# Altium PCB ToneControl.PcbDoc
Units mil, origin at the board's own origin, x right, y up, seen from the top; angles counter-clockwise.
Board outline 3700 x 3700 mil, 2 copper layers (Top Layer, Bottom Layer); 38 components, 33 nets, 92 pads, 0 vias.
Unrouted connection lines stored in the file: 1.
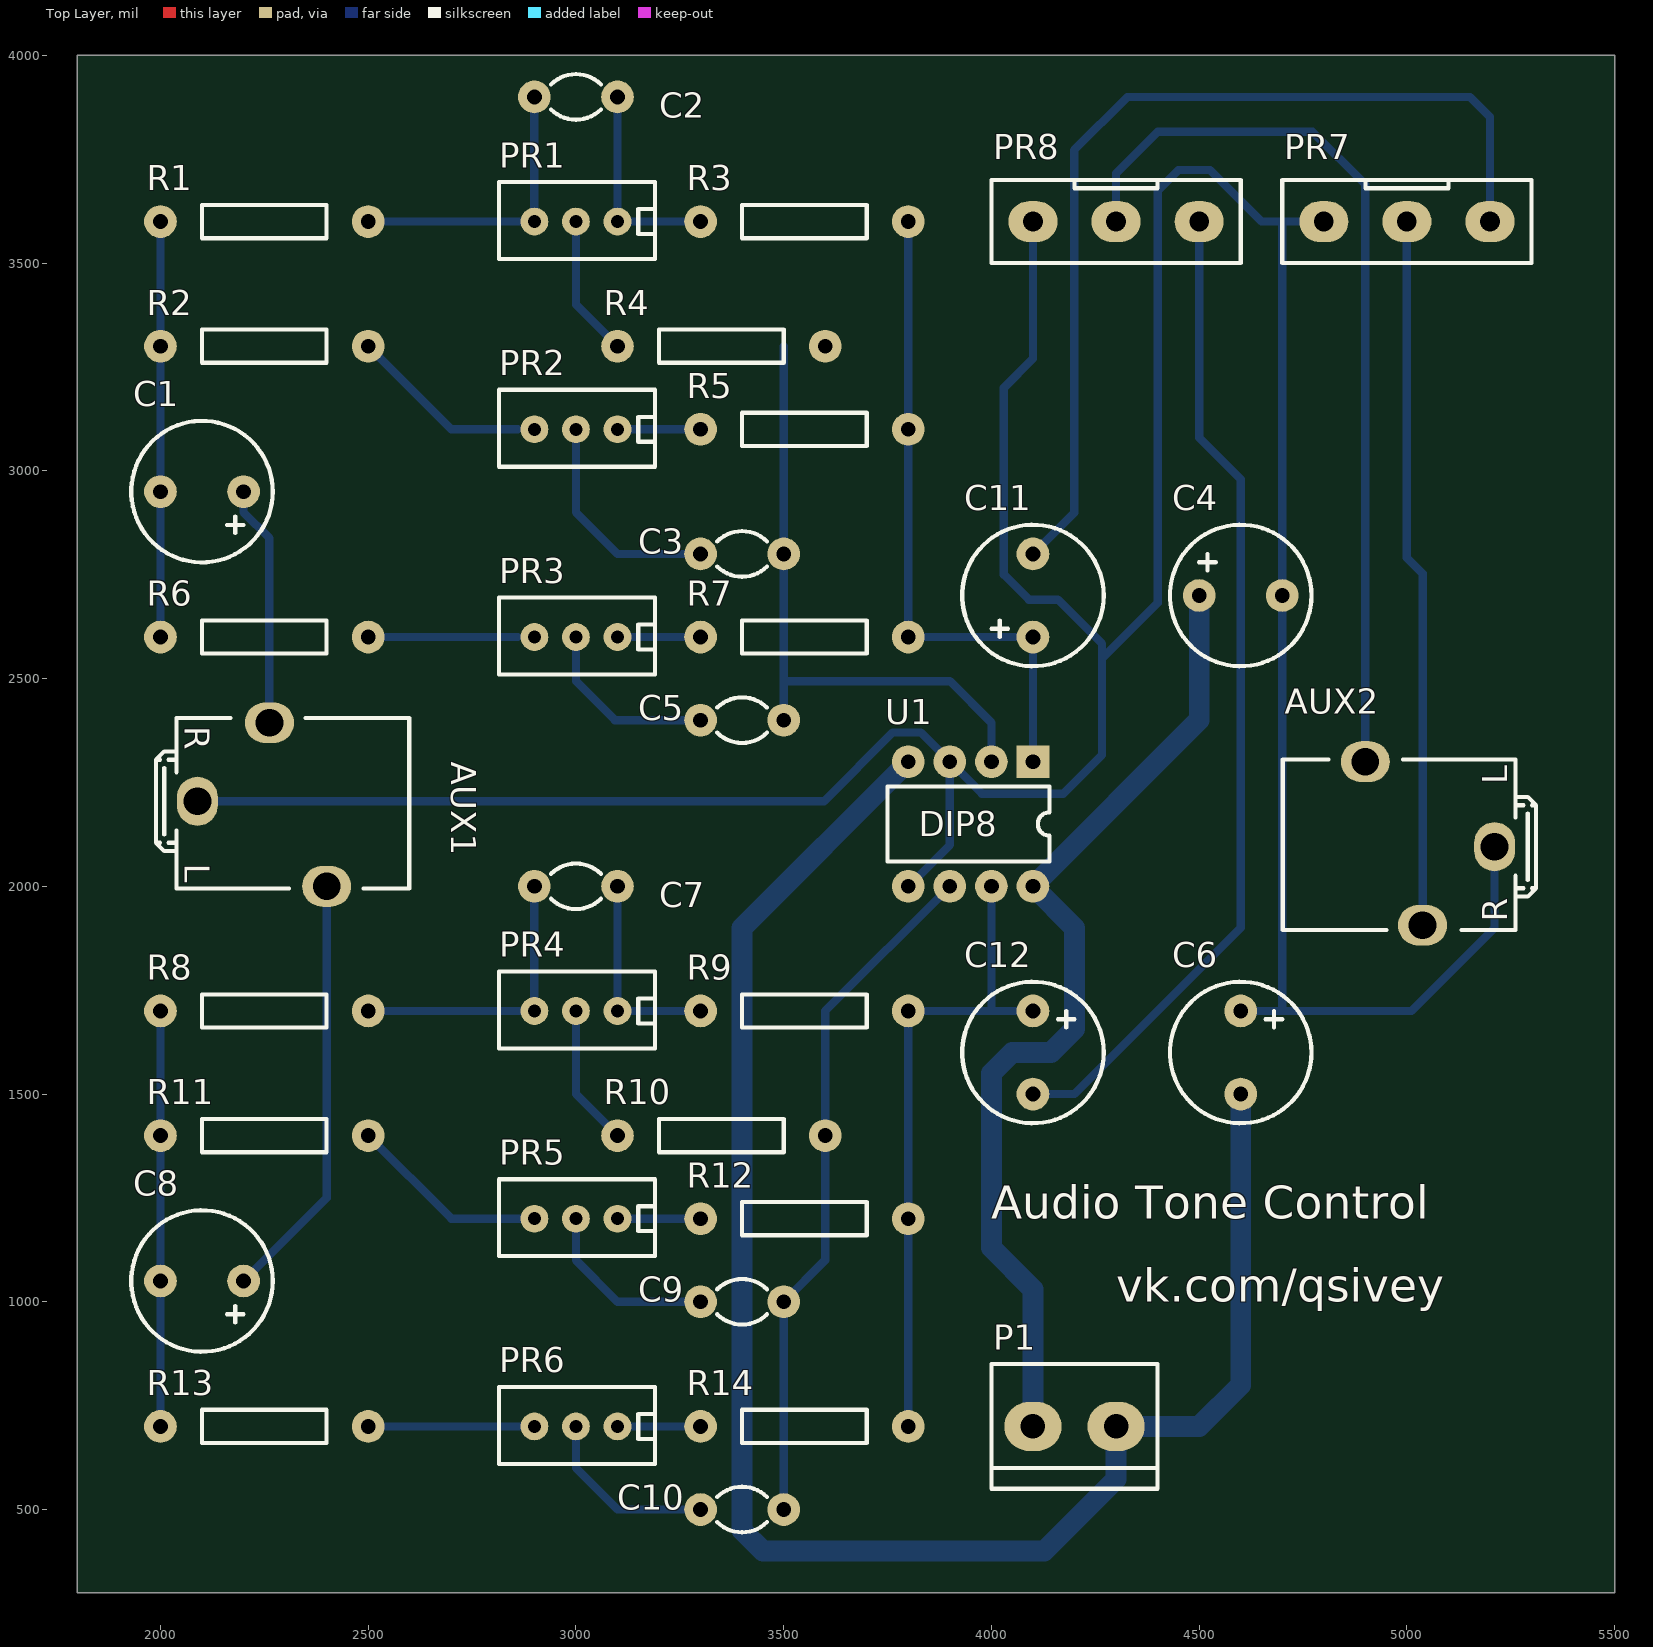
[diagram p0: Top Layer view]
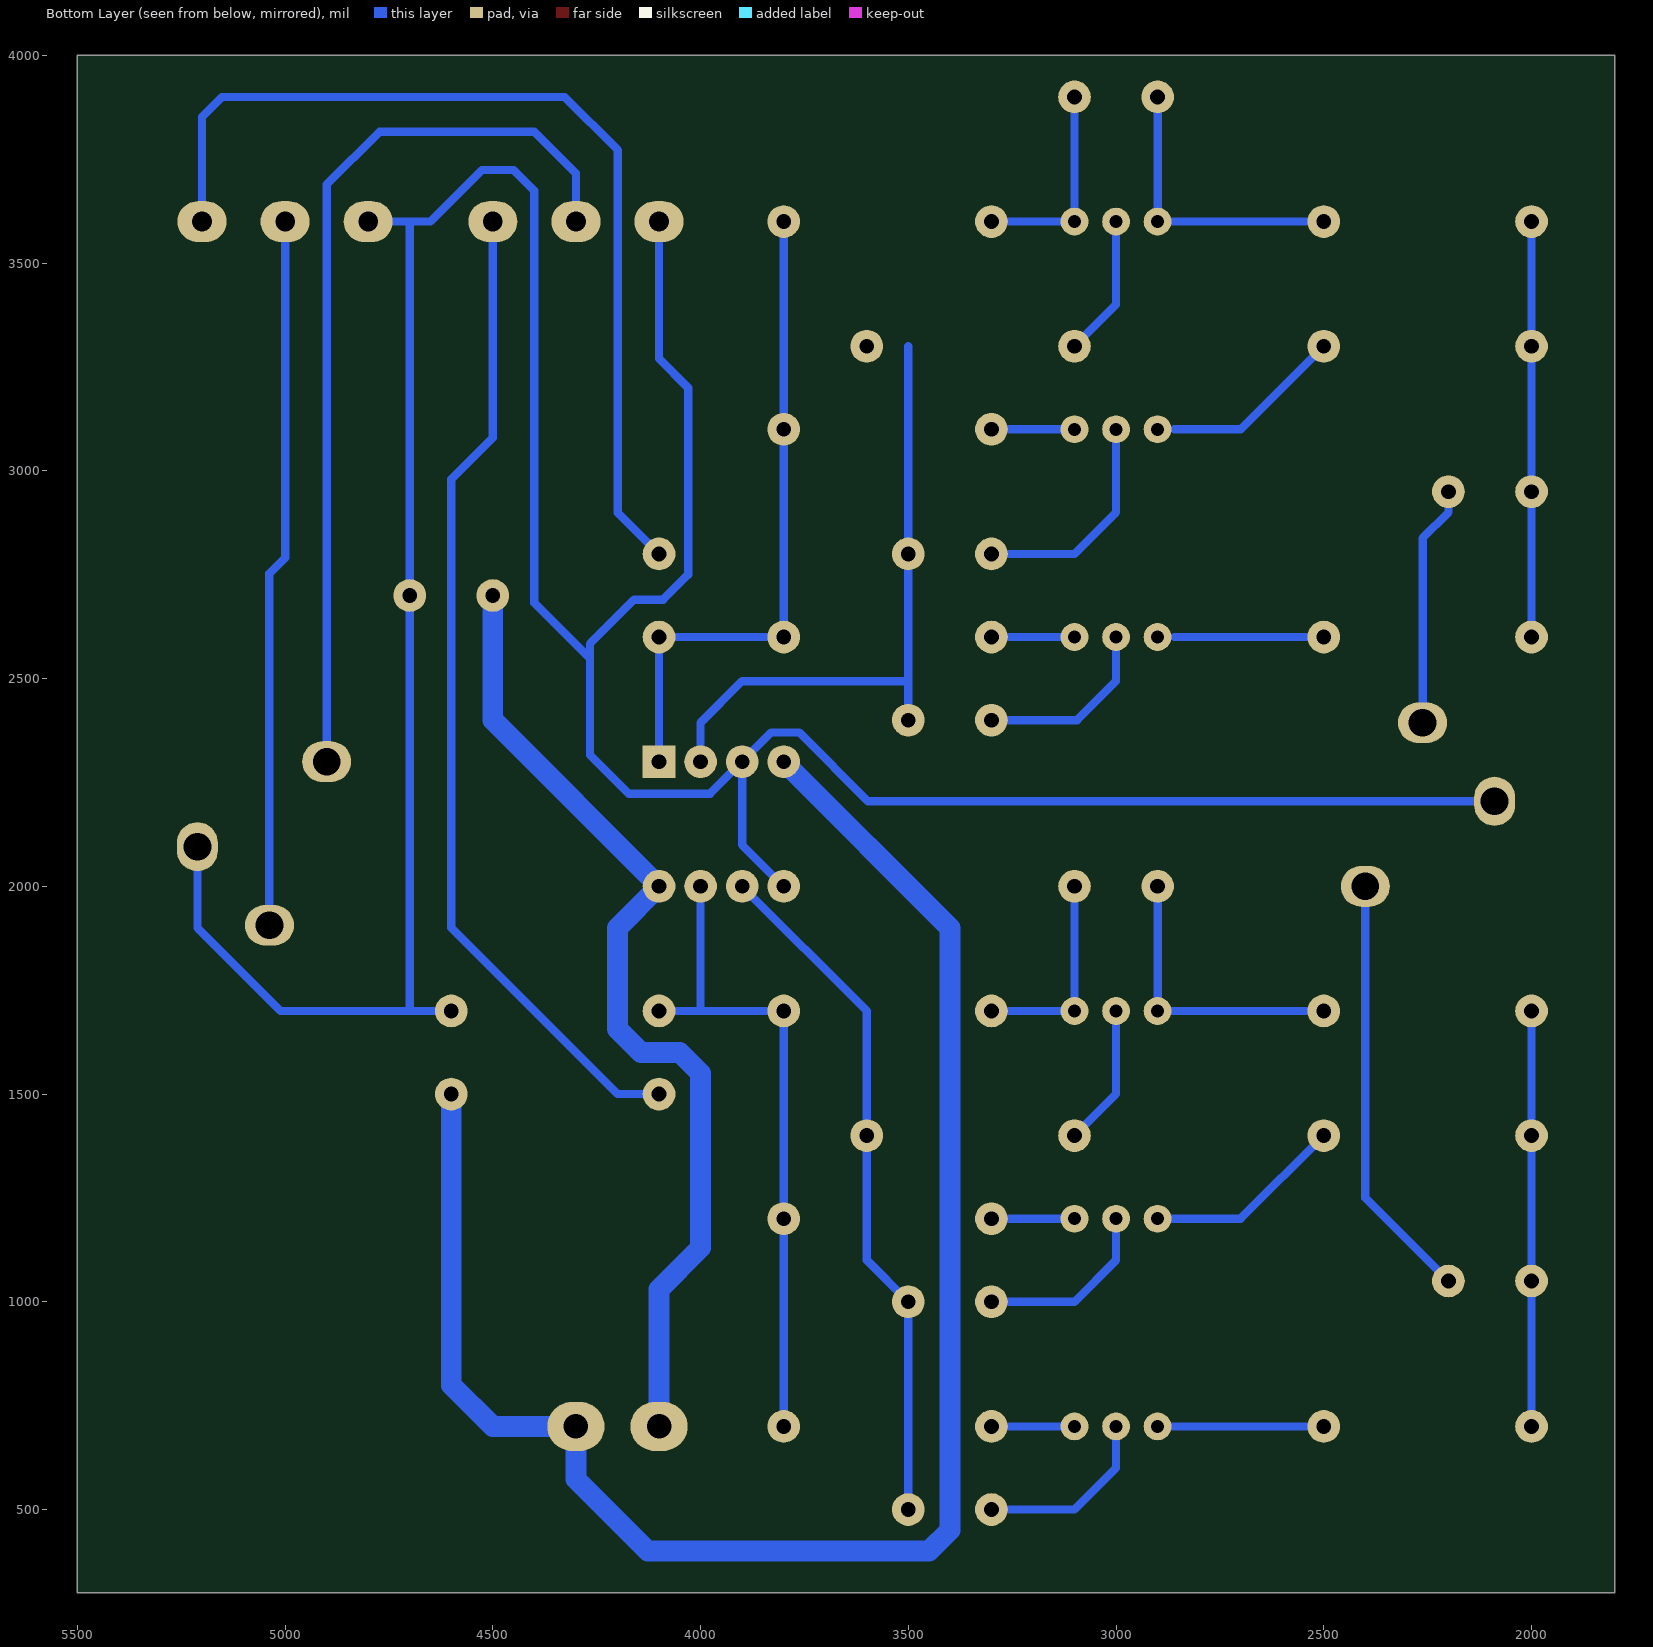
[diagram p1: Bottom Layer view, seen from below]

## Layer stack, top to bottom
Top Solder: solder mask 0.4, Solder Resist, Dk 3.5
Top Layer: signal copper 1.4
Dielectric 1: dielectric 12.6, FR-4, Dk 4.8
Bottom Layer: signal copper 1.4
Bottom Solder: solder mask 0.4, Solder Resist, Dk 3.5

## Board outline
1800,300 1800,4000 5500,4000 5500,300

## Design rules (kind name [scope] priority, off if disabled: settings)
BoardOutlineClearance [All] p1: gap=78.74 ignorepadtopadclearanceinfootprint=FALSE
Clearance [All] p1: gap=20 ignorepadtopadclearanceinfootprint=FALSE
Length [All] p1: maxlimit=99999 minlimit=0
ParallelSegment [All] p1: limit=10000 gap=20
PolygonConnect [All] p1: connectstyle=Relief reliefconductorwidth=10 reliefentries=4 polygonreliefangle="90 Angle" airgapwidth=10
RoutingVias [All] p1: holewidth=28 width=50 viastyle="Through Hole" minholewidth=28 minwidth=50 maxholewidth=28 maxwidth=50
SolderMaskExpansion [All] p1: expansion=4 istentingtop=FALSE
Width [All] p1: maxlimit=50 minlimit=20 preferedwidth=20
30 further rules are at their usual default settings.

## Components (designator, comment, footprint, x,y, rotation, side; value= is the part's Value field where it differs from the comment)
AUX1 "AUX" AUX_2 2088.98,2204.72 r0 top
AUX2 "AUX" AUX_2 5211.02,2095.28 r180 top
C1 "10uF" CAP_POL_MED 2200,2950 r180 top
C2 "47nF" CAP_CER_MED 2900,3900 r0 top
C3 "22nF" CAP_CER_MED 3300,2800 r0 top
C4 "33uF" CAP_POL_MED 4500,2700 r0 top
C5 "4.7nF" CAP_CER_MED 3300,2400 r0 top
C6 "33uF" CAP_POL_MED 4600,1700 r270 top
C7 "47nF" CAP_CER_MED 2900,2000 r0 top
C8 "10uF" CAP_POL_MED 2200,1050 r180 top
C9 "22nF" CAP_CER_MED 3300,1000 r0 top
C10 "4.7nF" CAP_CER_MED 3300,500 r0 top
C11 "10uF" CAP_POL_MED 4100,2600 r90 top
C12 "10uF" CAP_POL_MED 4100,1700 r270 top
P1 "Header_2" HEADER2 4100,700 r90 top
PR1 "100K" REOSTAT_3296 3100,3600 r180 top
PR2 "100K" REOSTAT_3296 3100,3100 r180 top
PR3 "500K" REOSTAT_3296 3100,2600 r180 top
PR4 "100K" REOSTAT_3296 3100,1700 r180 top
PR5 "100K" REOSTAT_3296 3100,1200 r180 top
PR6 "500K" REOSTAT_3296 3100,700 r180 top
PR7 "10K" REOSTAT_CUS 5200,3600 r180 top
PR8 "10K" REOSTAT_CUS 4500,3600 r180 top
R1 "12K" RES_MED 2000,3600 r0 top
R2 "3.9K" RES_MED 2000,3300 r0 top
R3 "12K" RES_MED 3300,3600 r0 top
R4 "12K" RES_MED 3100,3300 r0 top
R5 "3.9K" RES_MED 3300,3100 r0 top
R6 "1.8K" RES_MED 2000,2600 r0 top
R7 "1.8K" RES_MED 3300,2600 r0 top
R8 "12K" RES_MED 2000,1700 r0 top
R9 "12K" RES_MED 3300,1700 r0 top
R10 "12K" RES_MED 3100,1400 r0 top
R11 "3.9K" RES_MED 2000,1400 r0 top
R12 "3.9K" RES_MED 3300,1200 r0 top
R13 "1.8K" RES_MED 2000,700 r0 top
R14 "1.8K" RES_MED 3300,700 r0 top
U1 "TL-082" DIP8 4100,2300 r270 top

## Footprints (in the part's own frame and the unit in brackets; to place one, negate y for a bottom-side part, rotate by r counter-clockwise, add the part's x,y. Pads: shape width x height; smd on the part's side, far side on the other; paste and mask are expansions set on the pad)
AUX_2 [mm]
  oval 2.5x3 hole 1.7: 1(0,0)
  oval 3x2.5 hole 1.7: 2(4.4,4.8) 3(7.9,-5.2)
  silkscreen extent -2.54,-5.33 12.95,5.08, body extent -2.77,-5.59 13.21,5.33, height 4.57
CAP_CER_MED [mm]
  round 2 hole 0.9: 1(0,0) 2(5.08,0)
  silkscreen extent 1.02,-1.39 4.06,1.39, body extent -0.51,-0.51 5.59,0.51, height 7.37
CAP_POL_MED [mm]
  round 2 hole 0.9: 1(0,0) 2(5.08,0)
  silkscreen extent -1.79,-4.32 6.86,4.32, body extent -1.52,-4.06 6.67,4.06, height 13.61
DIP8 [mm]
  rect 2x2 hole 0.9: 1(0,0)
  round 2 hole 0.9: 2(0,-2.54) 3(0,-5.08) 4(0,-7.62) 5(7.62,-7.62) 6(7.62,-5.08) 7(7.62,-2.54) 8(7.62,0)
  silkscreen extent 1.52,-8.89 6.1,1.02, body extent -0.13,-8.89 7.75,1.27, height 3.05
HEADER2 [mm]
  oval 3x3.5 hole 1.5: 1(0,0) 2(0,-5.08)
  silkscreen extent -3.81,-7.62 3.81,2.54, body extent -3.81,-8 4.06,2.67, height 10.02
REOSTAT_3296 [mm]
  round 1.7 hole 0.8: 1(0,0) 2(2.54,0) 3(5.08,0)
  silkscreen extent -2.29,-2.41 7.24,2.29, body extent -2.54,-2.29 7.37,2.41, height 10.13
REOSTAT_CUS [mm]
  oval 3x2.5 hole 1.2: 1(0,0) 2(5.08,0) 3(10.16,0)
  silkscreen extent -2.54,-2.54 12.7,2.54, body extent -2.54,-18.8 12.7,6.6, height 15.24
RES_MED [mm]
  round 2 hole 0.9: 1(0,0) 2(12.7,0)
  silkscreen extent 2.54,-1.02 10.16,1.02, body extent -0.25,-1.52 12.95,1.52, height 3.05

## Part data
C1 C4 C6 C8 C11 C12: library part Cap_Pol
C2 C3 C5 C7 C9 C10: library part Cap_Ceram
PR1 PR2 PR3 PR4 PR5 PR6 PR7 PR8: library part Reostat
R1 R2 R3 R4 R5 R6 R7 R8 R9 R10 R11 R12 R13 R14: library part Res
U1: library part OpAmp_8, Name=TL-082

## Nets (pads, with @x,y where several pads share a name; then routed paths per layer and width w, separated by ;. In a path a pad name is that pad's centre, name@x,y a point inside that pad or via, vN(x,y) a via of type N, cw(c..) or ccw(c..) an arc to the next point about the centre after c; other vN are vias at no path point)
+5V: C4.1 P1.1 U1.8 | length 2386.1
  Bottom Layer w50: P1.1 4100,1030 4000,1130 4000,1550 4050,1600 4143.43,1600 4200,1656.57 4200,1900 U1.8 4500,2400 C4.1
-5V: C6.2 P1.2 U1.4 | length 4176.5
  Bottom Layer w50: U1.4 3400,1900 3400,450 3450,400 4127,400 4300,573 P1.2 4500,700 4600,800 C6.2
GND: AUX1.1 AUX2.1 C4.2 C6.1 PR7.3 PR8.3 U1.3 U1.5 | length 8580.8
  Bottom Layer w20: AUX1.1 3597,2204.72 3762.28,2370 3830,2370 U1.3 ; U1.5 3900,2100 U1.3 ; PR8.3 4100,3270 4030,3200 4030,2750 4090,2690 4160,2690 4266,2584 4266,2548 ; C6.1 4700,1700 ; PR7.3 4700,3600 ; AUX2.1 5211.02,1900 5011.02,1700 4700,1700 ; U1.3 3977,2223 4173,2223 4266,2316 4266,2548 ; 4266,2548 4400,2682 4400,3674 4450,3724 4526,3724 4650,3600 4700,3600 ; 4700,1700 C4.2 4700,3600
NetAUX1_2: AUX1.2 C1.1 | length 582.1
  Bottom Layer w20: C1.1 2200,2900 2262.2,2837.8 AUX1.2
NetAUX1_3: AUX1.3 C8.1 | length 1032.8
  Bottom Layer w20: C8.1 2400,1250 AUX1.3
NetAUX2_2: AUX2.2 PR7.2 | length 1709.4
  Bottom Layer w20: PR7.2 5000,2790.8 5037.8,2753 AUX2.2
NetAUX2_3: AUX2.3 PR8.2 | length 2199
  Bottom Layer w20: PR8.2 4300,3716 4400,3816 4773,3816 4900,3689 AUX2.3
NetC1_2: C1.2 R1.1 R2.1 R6.1 | length 1000
  Bottom Layer w20: R6.1 C1.2 R2.1 R1.1
NetC2_1: C2.1 PR1.3 R1.2 | length 700
  Bottom Layer w20: R1.2 PR1.3 C2.1
NetC2_2: C2.2 PR1.1 R3.1 | length 500
  Bottom Layer w20: C2.2 PR1.1 R3.1
NetC3_1: C3.1 PR2.2 | length 541.4
  Bottom Layer w20: PR2.2 3000,2900 3100,2800 C3.1
NetC3_2: C3.2 C5.2 R4.2 U1.2 | length 1535.1
  Bottom Layer w20: C5.2 3500,2493.7 ; 3500,3300 C3.2 3500,2493.7 ; U1.2 4000,2393.7 3900,2493.7 3500,2493.7
NetC5_1: C5.1 PR3.2 | length 445.1
  Bottom Layer w20: PR3.2 3000,2493.7 3093.7,2400 C5.1
NetC7_1: C7.1 PR4.3 R8.2 | length 700
  Bottom Layer w20: R8.2 PR4.3 C7.1
NetC7_2: C7.2 PR4.1 R9.1 | length 500
  Bottom Layer w20: C7.2 PR4.1 R9.1
NetC8_2: C8.2 R8.1 R11.1 R13.1 | length 1000
  Bottom Layer w20: R13.1 C8.2 R11.1 R8.1
NetC9_1: C9.1 PR5.2 | length 441.4
  Bottom Layer w20: PR5.2 3000,1100 3100,1000 C9.1
NetC9_2: C9.2 C10.2 R10.2 U1.6 | length 1665.7
  Bottom Layer w20: C10.2 C9.2 3600,1100 R10.2 3600,1700 U1.6
NetC10_1: C10.1 PR6.2 | length 441.4
  Bottom Layer w20: PR6.2 3000,600 3100,500 C10.1
NetC11_1: C11.1 R3.2 R5.2 R7.2 U1.1 | length 1600
  Bottom Layer w20: R3.2 R5.2 R7.2 C11.1 U1.1
NetC11_2: C11.2 PR7.1 | length 2338.9
  Bottom Layer w20: C11.2 4199,2899 4199,3772 4327,3900 5152,3900 5200,3852 PR7.1
NetC12_1: C12.1 R9.2 R12.2 R14.2 U1.7 | length 1600
  Bottom Layer w20: R14.2 R12.2 R9.2 4000,1700 ; U1.7 4000,1700 ; C12.1 4000,1700
NetC12_2: C12.2 PR8.1 | length 2407.1
  Bottom Layer w20: C12.2 4200,1500 4600,1900 4600,2980 4500,3080 PR8.1
NetPR1_2: PR1.2 R4.1 | length 341.4
  Bottom Layer w20: PR1.2 3000,3400 R4.1
NetPR2_1: PR2.1 R5.1 | length 200
  Bottom Layer w20: PR2.1 R5.1
NetPR2_3: PR2.3 R2.2 | length 442.8
  Bottom Layer w20: R2.2 2700,3100 2860,3100
NetPR3_1: PR3.1 R7.1 | length 200
  Bottom Layer w20: PR3.1 R7.1
NetPR3_3: PR3.3 R6.2 | length 360
  Bottom Layer w20: R6.2 2860,2600
NetPR4_2: PR4.2 R10.1 | length 341.4
  Bottom Layer w20: PR4.2 3000,1500 R10.1
NetPR5_1: PR5.1 R12.1 | length 200
  Bottom Layer w20: PR5.1 R12.1
NetPR5_3: PR5.3 R11.2 | length 482.8
  Bottom Layer w20: R11.2 2700,1200 PR5.3
NetPR6_1: PR6.1 R14.1 | length 200
  Bottom Layer w20: PR6.1 R14.1
NetPR6_3: PR6.3 R13.2 | length 400
  Bottom Layer w20: R13.2 PR6.3

## Silkscreen, mask and mechanical layers (free items; w line width, h text height)
Top Overlay:
  text "Audio Tone Control" at 4000,1200 h80
  text "vk.com/qsivey" at 4300,1000 h80
Mechanical 1:
  the board outline again, w78.74

## Text inside footprints (layer, text, board x,y; h text height)
AUX1: Top Overlay "L" at 2058.98,2054.72 h60 r270; Top Overlay "R" at 2058.98,2384.72 h60 r270
AUX2: Top Overlay "L" at 5241.02,2245.28 h60 r90; Top Overlay "R" at 5241.02,1915.28 h60 r90
U1: Top Overlay "DIP8" at 3825,2120 h60